# Altium PCB XiaoZhi.pcbdoc (part 1 of 3)
Units mm, origin at the board's own origin, x right, y up, seen from the top; angles counter-clockwise.
Board outline 82.34 x 112.32 mm, 2 copper layers (Top Layer, Bottom Layer); 165 components, 129 nets, 592 pads, 327 vias.
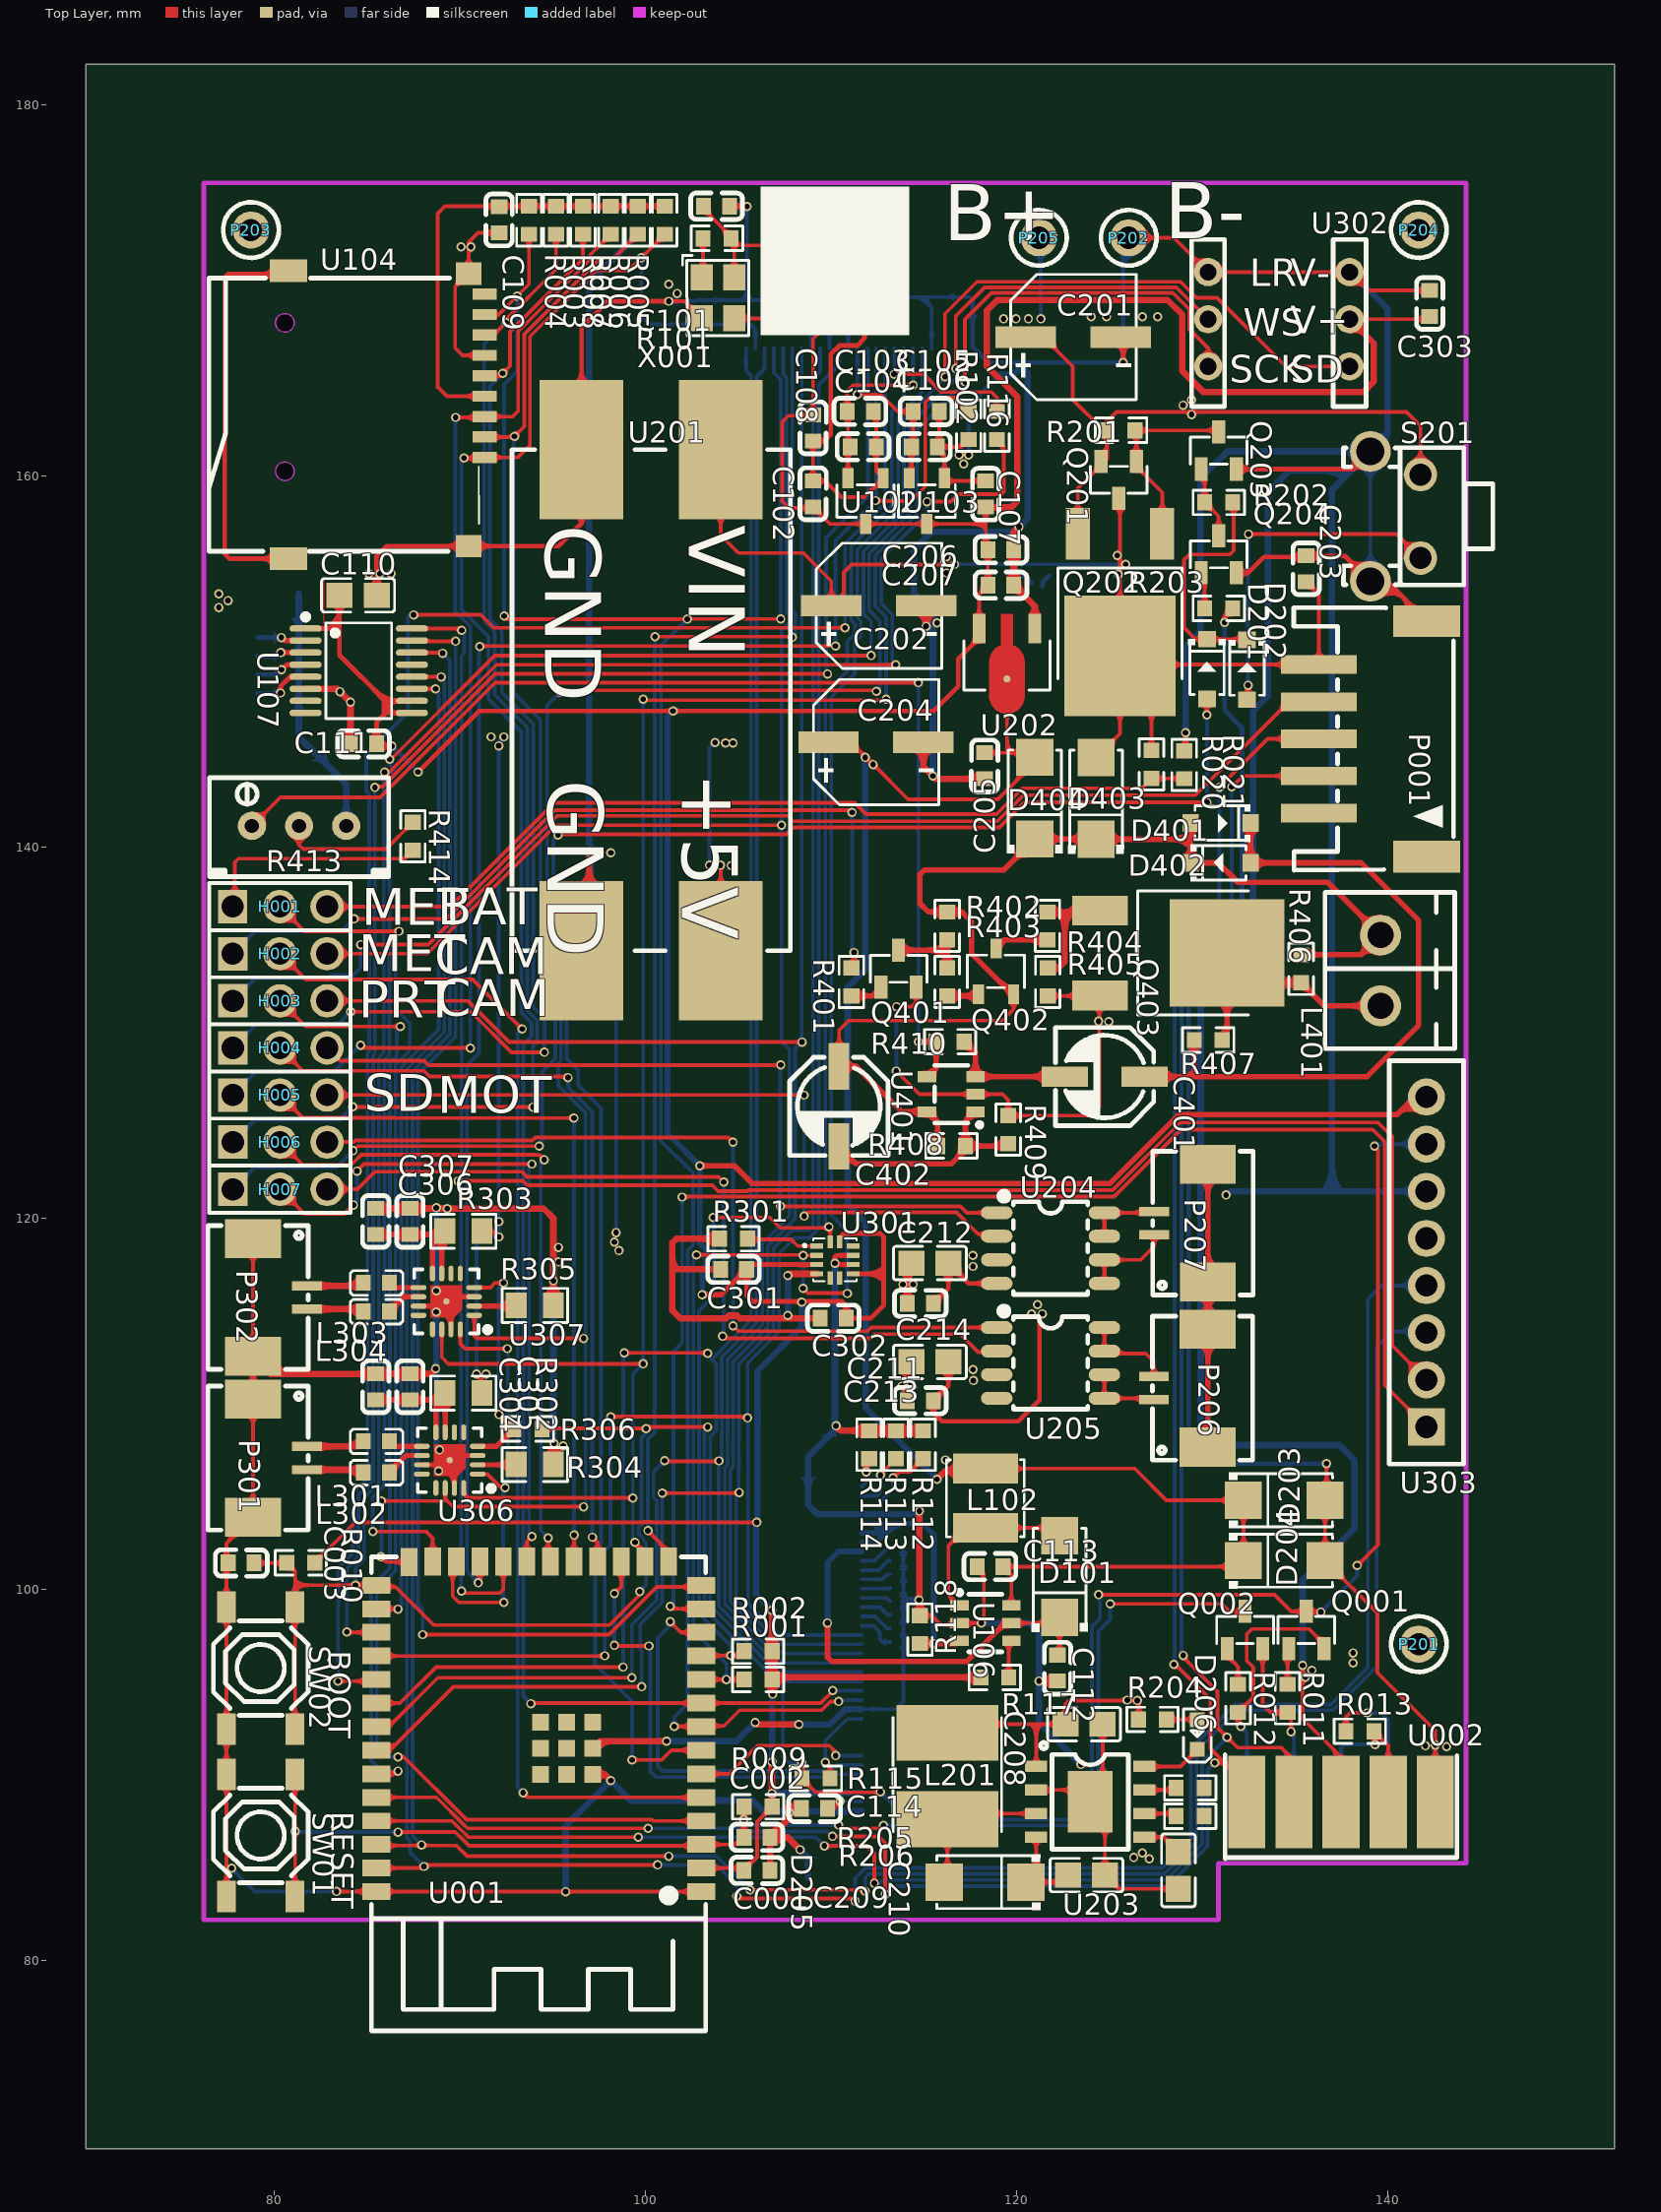
[diagram p0: Top Layer view]
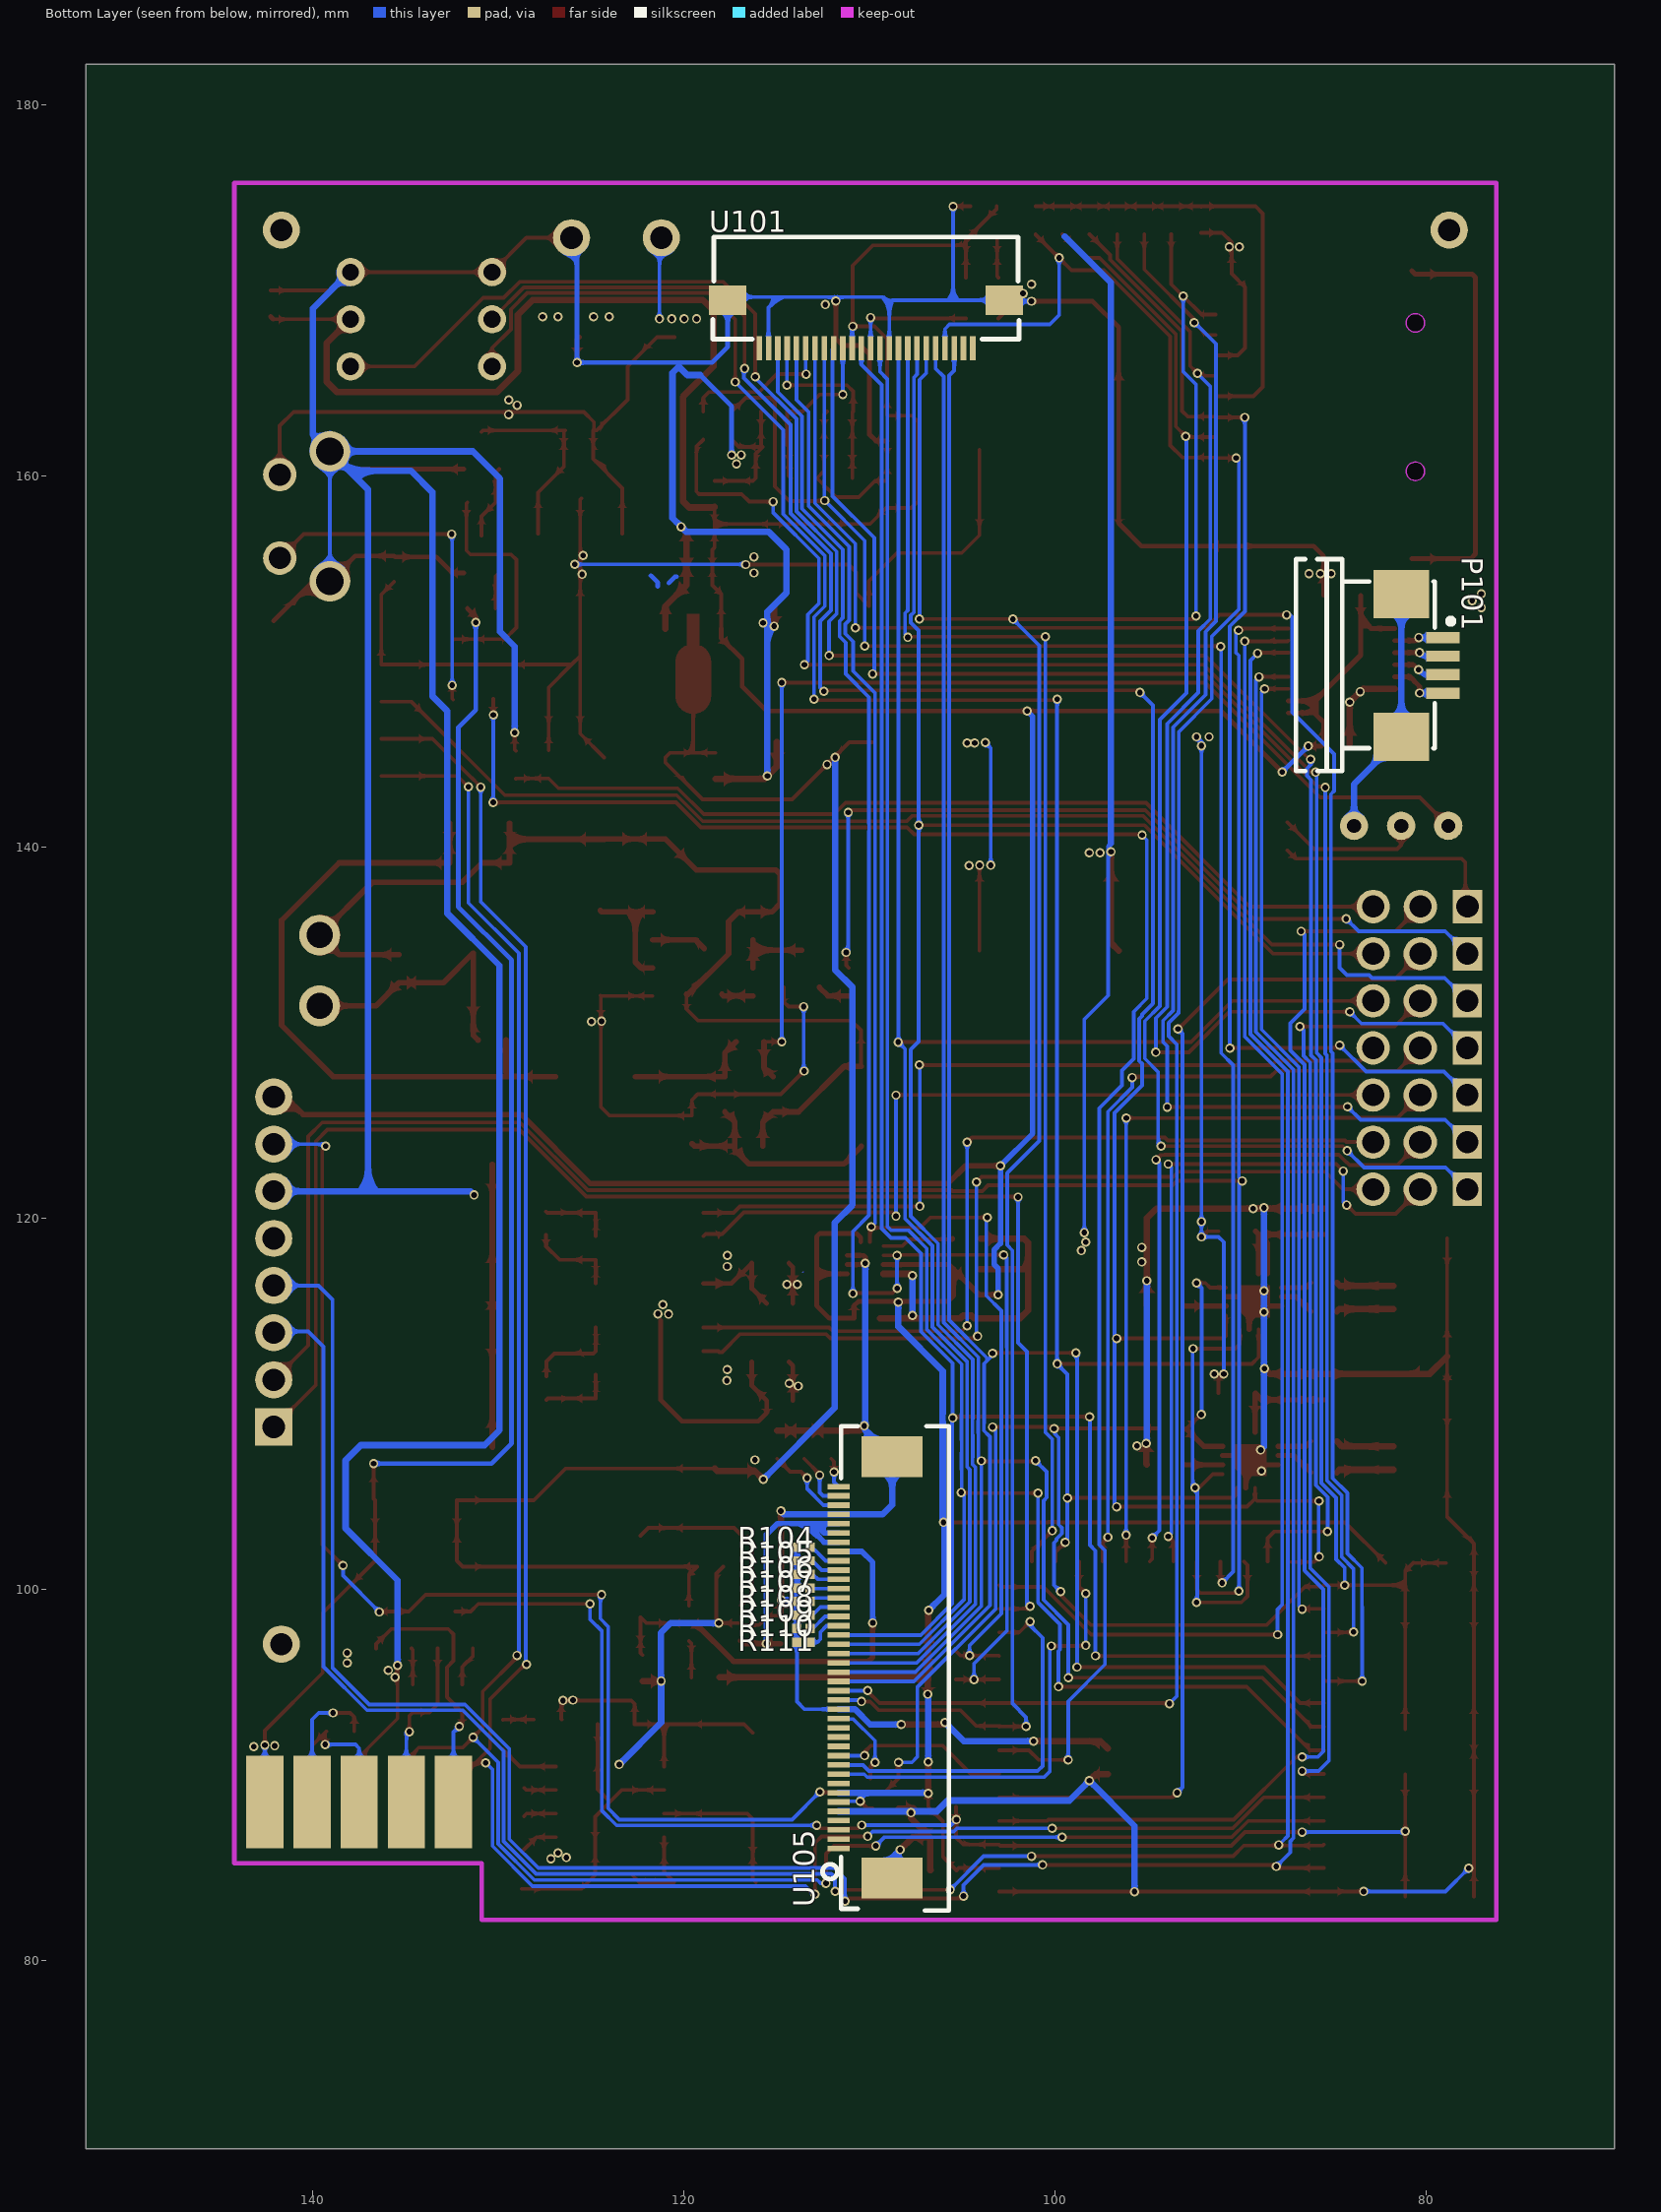
[diagram p1: Bottom Layer view, seen from below]

## Layer stack, top to bottom
Top Layer: signal copper (thickness not stored)
Dielectric: dielectric 0.32, FR-4, Dk 4.8
Bottom Layer: signal copper (thickness not stored)

## Board outline
152.188,69.85 69.85,69.85 69.85,182.168 152.188,182.168

## Design rules (kind name [scope] priority, off if disabled: settings)
BoardOutlineClearance copperThickness1oz [All] p0: genericclearance=0.254 ignorepadtopadclearanceinfootprint=FALSE except(0: Arc-SplitContinuation Track-SplitContinuation SMDPad-SplitContinuation THPad-SplitContinuation Via-SplitContinuation Fill-SplitContinuation Poly-SplitContinuation Region-SplitContinuation Text-SplitContinuation; 0.152: Track-CutoutEdge SMDPad-CutoutEdge THPad-CutoutEdge Via-CutoutEdge Region-CutoutEdge; 0.3: Track-OutlineEdge SMDPad-OutlineEdge THPad-OutlineEdge Via-OutlineEdge Fill-OutlineEdge Region-OutlineEdge Poly-OutlineEdge Text-OutlineEdge Fill-CutoutEdge)
BoardOutlineClearance copperThickness2oz [All] p0: genericclearance=0.254 ignorepadtopadclearanceinfootprint=FALSE except(0: Arc-SplitContinuation Track-SplitContinuation SMDPad-SplitContinuation THPad-SplitContinuation Via-SplitContinuation Fill-SplitContinuation Poly-SplitContinuation Region-SplitContinuation Text-SplitContinuation; 0.152: Track-CutoutEdge SMDPad-CutoutEdge THPad-CutoutEdge Via-CutoutEdge Region-CutoutEdge; 0.3: Track-OutlineEdge SMDPad-OutlineEdge THPad-OutlineEdge Via-OutlineEdge Fill-OutlineEdge Region-OutlineEdge Poly-OutlineEdge Text-OutlineEdge Fill-CutoutEdge)
Clearance copperThickness1oz [(InNet('GND') OR InNet('CAM_RESET') OR InNet('CAM_PWDN') OR InNet('CAM_2V8') OR InNet('CAM_1V2') OR InNet('CAM_VSYNC') OR InNet('CAM_HREF') OR InNet('CAM_D7') OR InNet('CAM_XCLK') OR InNet('CAM_D6') OR InNet('CAM_D5') OR InNet('CAM_PCLK') OR InNet('CAM_D4') OR InNet('CAM_D0') OR InNet('CAM_D3') OR InNet('CAM_D1') OR InNet('CAM_D2') OR InNet('$2N1529') OR InNet('CAM_SDA') OR InNet('CAM_SCL') OR InNet('+3V3') OR InNet('SYS_RESET') OR InNet('GPIO4') OR InNet('GPIO6') OR InNet('GPIO7') OR InNet('GPIO8') OR InNet('GPIO19') OR InNet('GPIO20') OR InNet('GPIO46') OR InNet('GPIO9') OR InNet('GPIO10') OR InNet('GPIO11') OR InNet('GPIO12') OR InNet('GPIO13') OR InNet('GPIO14') OR InNet('GPIO47') OR InNet('GPIO48') OR InNet('GPIO45') OR InNet('GPIO35') OR InNet('GPIO2') OR InNet('GPIO1') OR InNet('$2N4034') OR InNet('$2N5674') OR InNet('+5V') OR InNet('$2N9566') OR InNet('$2N4288') OR InNet('$2N4289') OR InNet('$2N4290') OR InNet('$2N4291') OR InNet('$4N1223') OR InNet('$4N1101') OR InNet('$2N3573') OR InNet('$2N3651') OR InNet('$2N3677') OR InNet('$2N3703') OR InNet('$2N3729') OR InNet('$2N3755') OR InNet('$2N3781') OR InNet('$2N3807') OR InNet('$2N3906') OR InNet('$2N3932') OR InNet('$2N3958') OR InNet('$2N4007') OR InNet('$2N9598') OR InNet('$2N5846') OR InNet('$3N786') OR InNet('ESP32_RXD') OR InNet('ESP32_TXD') OR InNet('$1N6467') OR InNet('$1N6461') OR InNet('$1N6473') OR InNet('$1N6454') OR InNet('$1N6533') OR InNet('VBIN') OR InNet('+12V') OR InNet('$4N3143') OR InNet('$4N3131') OR InNet('CH343_3V3') OR InNet('VUSB') OR InNet('$4N4759') OR InNet('$4N4778') OR InNet('$4N4910') OR InNet('$4N4869') OR InNet('$4N3126') OR InNet('$4N4944') OR InNet('$4N4990') OR InNet('GPIO5') OR InNet('$6N909') OR InNet('$6N916') OR InNet('$6N914') OR InNet('$6N910') OR InNet('METAL_ADC') OR InNet('METAL_DEC') OR InNet('$6N908') OR InNet('$6N902') OR InNet('$6N903') OR InNet('$6N904') OR InNet('$6N905') OR InNet('$6N906') OR InNet('$6N913') OR InNet('$6N919') OR InNet('GPIO42') OR InNet('PRINTER_DTR') OR InNet('$3N1786') OR InNet('$3N1782') OR InNet('$3N2345') OR InNet('$3N2408') OR InNet('$3N2349') OR InNet('$3N2410') OR InNet('$3N2354') OR InNet('$3N2458') OR InNet('$3N2359') OR InNet('$3N2460') OR InNet('$3N1823') OR InNet('$3N1859') OR InNet('$3N1773') OR InNet('$1N10662') OR InNet('SD_D0/MISO') OR InNet('SD_D3/CS') OR InNet('SD_CMD/MOSI') OR InNet('SD_CLK/SCK') OR InNet('MOT1_A') OR InNet('MOT1_B') OR InNet('MOT2_A') OR InNet('MOT2_B') OR InNet('$4N7783') OR InNet('$4N7788') OR InNet('$4N7774') OR InNet('$4N7778'))] p1: gap=0.178 ignorepadtopadclearanceinfootprint=FALSE except(0.102: Track-Track; 0.119: Track-Via; 0.152: Track-SMDPad SMDPad-SMDPad Track-THPad SMDPad-THPad THPad-THPad SMDPad-Via THPad-Via Via-Via SMDPad-Fill THPad-Fill Via-Fill Fill-Fill Track-Region SMDPad-Region THPad-Region Via-Region Region-Region Track-Poly SMDPad-Poly THPad-Poly Via-Poly Fill-Poly Region-Poly Poly-Poly Track-Text SMDPad-Text THPad-Text Via-Text Fill-Text Region-Text Poly-Text Text-Text; 0.175: Track-Hole SMDPad-Hole THPad-Hole Via-Hole Fill-Hole Region-Hole Poly-Hole Text-Hole Sheet-Hole; 0.3: Track-Fill Fill-Region Track-Sheet SMDPad-Sheet THPad-Sheet Via-Sheet Fill-Sheet Region-Sheet Poly-Sheet Text-Sheet)
Clearance copperThickness2oz [All] p1: gap=0.178 ignorepadtopadclearanceinfootprint=FALSE except(0.152: Track-SMDPad SMDPad-SMDPad Track-THPad SMDPad-THPad THPad-THPad Track-Via SMDPad-Via THPad-Via Via-Via SMDPad-Fill THPad-Fill Via-Fill Fill-Fill Track-Region SMDPad-Region THPad-Region Via-Region Region-Region Track-Poly SMDPad-Poly THPad-Poly Via-Poly Fill-Poly Region-Poly Poly-Poly Track-Text SMDPad-Text THPad-Text Via-Text Fill-Text Region-Text Poly-Text Text-Text; 0.175: Track-Hole SMDPad-Hole THPad-Hole Via-Hole Fill-Hole Region-Hole Poly-Hole Text-Hole Sheet-Hole; 0.203: Track-Track; 0.3: Track-Fill Fill-Region Track-Sheet SMDPad-Sheet THPad-Sheet Via-Sheet Fill-Sheet Region-Sheet Poly-Sheet Text-Sheet)
DiffPairsRouting differentialPair [All] p1: maxuncoupledlength=10 minlimit=6 maxlimit=6 mostfreqgap=6 toplayer_minwidth=5 toplayer_prefwidth=10 toplayer_maxwidth=100 bottomlayer_minwidth=5 bottomlayer_prefwidth=10 bottomlayer_maxwidth=100
PasteMaskExpansion pasteMaskExpansion [All] p1: expansion=0
PlaneConnect innerPlane [All] p1: planeconnectstyle=Relief reliefexpansion=0.508 reliefentries=4 reliefconductorwidth=0.254 reliefairgap=0.254
PolygonConnect copperRegion [All] p1: connectstyle=Direct reliefentries=4 reliefconductorwidth=10 polygonreliefangle="90 Angle" airgapwidth=10
RoutingVias viaSize [All] p1: viastyle="Through Hole" holewidth=11.811 minholewidth=11.811 maxholewidth=248.0314 width=19.685 minwidth=19.685 maxwidth=393.7008
SolderMaskExpansion solderMaskExpansion [All] p1: useseparateexpansions=TRUE expansion=2 expansionbottom=2
Width copperThickness1oz [All] p1: maxlimit=100 minlimit=5 preferedwidth=10
Width copperThickness2oz [All] p1: maxlimit=100 minlimit=8 preferedwidth=10

## Components (designator, comment, footprint, x,y, rotation, side; value= is the part's Value field where it differs from the comment)
C001 "CAP_0603" C0603 105.99,84.848 r180 top
C002 "CAP_0603" C0603 106.005,86.626 r0 top
C003 "CAP_0603" C0603 78.21,101.41 r180 top
C101 "CAP_0603" C0603 103.83,174.52 r0 top
C102 "CAP_0603" C0603 109.021,159.016 r270 top
C103 "CAP_0603" C0603 111.561,163.461 r0 top
C104 "CAP_0603" C0603 111.724,161.556 r0 top
C105 "CAP_0603" C0603 115.117,163.461 r0 top
C106 "CAP_0603" C0603 115.026,161.556 r0 top
C107 "100nF" C0603 118.328,159.016 r90 top
C108 "0.1UF" C0603 109.021,162.572 r270 top
C109 "CAP_0603" C0603 92.11,173.789 r90 top
C110 "CGA0805X5R106K250MT" C0805 84.51,153.555 r0 top
C111 "CGA0603X7R104K500JT" C0603 84.8,145.554 r0 top
C112 "1uF" C0603 122.2,95.75 r90 top
C113 "1uF" C0603 118.561,101.216 r0 top
C114 "CAP_0603" C0603 109.105,88.182 r180 top
C201 "VEJ101M1CTR-0605" CAP-SMD_BD6.3-L6.6-W6.6-LS7.2-R-RD 123.04,167.47 r180 top
C202 "VEJ101M1CTR-0605" CAP-SMD_BD6.3-L6.6-W6.6-LS7.2-R-RD 112.56,152.99 r180 top
C203 "CAP_0603" C0603 135.59,154.98 r270 top
C204 "VEJ101M1CTR-0605" CAP-SMD_BD6.3-L6.6-W6.6-LS7.2-R-RD 112.41,145.64 r180 top
C205 "CAP_0603" C0603 118.27,144.37 r90 top
C206 "CAP_0603" C0603 119.14,156.009 r180 top
C207 "CAP_0603" C0603 119.14,154.104 r180 top
C208 "CAP_0603" C0805 123.626,92.722 r0 top
C209 "CAP_0603" C0805 123.753,84.594 r0 top
C210 "CAP_0603" C0805 128.706,84.848 r270 top
C211 "CAP_0603" C0805 115.317,112.247 r180 top
C212 "CAP_0603" C0805 115.317,117.567 r180 top
C213 "CAP_0603" C0603 114.81,110.16 r0 top
C214 "CAP_0603" C0603 114.81,115.394 r0 top
C301 "CGA0603X7R104K500JT" C0603 104.739,117.233 r180 top
C302 "CGA0603X7R104K500JT" C0603 110.11,114.6 r0 top
C303 "CGA0603X7R104K500JT" C0603 142.25,169.28 r270 top
C304 "22uF" C0603 85.46,110.9 r270 top
C305 "100nF" C0603 87.3,110.9 r270 top
C306 "22uF" C0603 87.3,119.81 r270 top
C307 "100nF" C0603 85.46,119.81 r270 top
C401 "1uF/50V" CAP-SMD_BD5.0-L5.3-W5.3-RD 124.73,127.62 r0 top
C402 "100uF/50V" CAP-SMD_BD5.0-L5.3-W5.3-RD 110.41,126.02 r90 top
D101 "SS14_C84343" SMA_L4.3-W2.6-LS5.2-RD 122.31,100.68 r90 top
D201 "1N4148W-E3-18" SOD-123_L2.7-W1.6-LS3.7-FD 132.403,149.544 r90 top
D202 "1N4148W-E3-18" SOD-123_L2.7-W1.6-LS3.7-FD 130.244,149.58 r90 top
D203 "SS34A_C211775" SMA_L4.3-W2.6-LS5.2-RD 134.41,104.792 r0 top
D204 "SS34A_C211775" SMA_L4.3-W2.6-LS5.2-RD 134.41,101.536 r0 top
D205 "SS34A_C211775" SMA_L4.3-W2.6-LS5.2-RD 118.292,84.213 r180 top
D206 "LED_0603-R" LED_0603 129.722,92.214 r90 top
D401 "1N4148W-E3-18" SOD-123_L2.7-W1.6-LS3.7-FD 130.98,141.28 r0 top
D402 "1N4148W-E3-18" SOD-123_L2.7-W1.6-LS3.7-FD 130.98,139.14 r180 top
D403 "SS34A_C211775" SMA_L4.3-W2.6-LS5.2-RD 124.27,142.61 r90 top
D404 "SS34A_C211775" SMA_L4.3-W2.6-LS5.2-RD 120.97,142.62 r90 top
H001 "2.54-1*3P针" HDR-TH_3P-P2.54-V-M-1 80.295,136.781 r0 top
H002 "2.54-1*3P针" HDR-TH_3P-P2.54-V-M-1 80.298,134.243 r0 top
H003 "2.54-1*3P针" HDR-TH_3P-P2.54-V-M-1 80.3,131.704 r0 top
H004 "2.54-1*3P针" HDR-TH_3P-P2.54-V-M-1 80.3,129.166 r0 top
H005 "2.54-1*3P针" HDR-TH_3P-P2.54-V-M-1 80.3,126.627 r0 top
H006 "2.54-1*3P针" HDR-TH_3P-P2.54-V-M-1 80.3,124.089 r0 top
H007 "2.54-1*3P针" HDR-TH_3P-P2.54-V-M-1 80.3,121.55 r0 top
L102 "YNR4030-220M" IND-SMD_L4.0-W4.0 118.307,104.899 r270 top
L201 "2.2uH" IND-SMD_L5.8-W5.2 116.26,89.928 r270 top
L301 "1uH" L0603 85.5,107.97 r180 top
L302 "1uH" L0603 85.5,106.29 r180 top
L303 "1uH" L0603 85.5,116.51 r180 top
L304 "1uH" L0603 85.5,114.964 r180 top
L401 "300~500uH" CONN-TH_2P-P3.81_KF2EDGV-3.81-2P 139.6,133.34 r90 top
P001 "HX20007-5AWB" CONN-SMD_5P-P2.00_HX20007-5AWB 139.18,145.82 r90 top
P101 "TS" FPC-SMD_4P-P1.00_AFA07-S04ECA-00 80.2,149.78 r270 bottom locked
P201 "Single_Pin" Single_Pin 141.66,97.04 r0 top locked
P202 "Single_Pin" Single_Pin 126.03,172.82 r0 top
P203 "Single_Pin" Single_Pin 78.74,173.24 r0 top locked
P204 "Single_Pin" Single_Pin 141.66,173.24 r0 top
P205 "Single_Pin" Single_Pin 121.193,172.82 r0 top
P206 "1.25-2P WT" CONN-SMD_1.25-2PWT 128.83,110.83 r270 top
P207 "1.25-2P WT" CONN-SMD_1.25-2PWT 128.85,119.72 r270 top
P301 "1.25-2P WT" CONN-SMD_1.25-2PWT 80.3,107.06 r90 top
P302 "1.25-2P WT" CONN-SMD_1.25-2PWT 80.3,115.72 r90 top
Q001 "SS8050" SOT-23-3_L2.9-W1.3-P1.90-LS2.4-BR 135.6,97.802 r270 top
Q002 "SS8050" SOT-23-3_L2.9-W1.3-P1.90-LS2.4-BR 132.298,97.802 r270 top
Q201 "AO3401_C181091" SOT-23-3_L2.9-W1.3-P1.90-LS2.4-BR 125.492,159.778 r90 top
Q202 "NCE40P40K" TO-252-2_L6.6-W6.1-P4.57-LS9.9-TL-CW 125.563,153.576 r270 top
Q203 "SS8050" SOT-23-3_L2.9-W1.3-P1.90-LS2.4-BR 130.879,161.355 r270 top
Q204 "SS8050" SOT-23-3_L2.9-W1.3-P1.90-LS2.4-BR 130.879,155.767 r270 top
Q401 "MMBT3904" SOT-23-3_L2.9-W1.3-P1.90-LS2.4-BR 113.63,133.435 r270 top
Q402 "MMBT3906-7-F" SOT-23-3_L2.9-W1.6-P1.90-LS2.8-BR 118.88,133.29 r270 top
Q403 "WSF10N40" TO-252-2_L6.6-W6.1-P4.57-LS9.9-BR-CW 127.9,134.28 r180 top
R001 "3.3K" R0603 106.061,95.135 r180 top
R002 "3.3K" R0603 106.061,96.659 r180 top
R003 "3.3K" R0603 95.172,173.764 r270 top
R004 "3.3K" R0603 93.716,173.764 r270 top
R005 "3.3K" R0603 101.034,173.764 r270 top
R006 "3.3K" R0603 99.579,173.764 r270 top
R007 "3.3K" R0603 98.123,173.764 r270 top
R008 "3.3K" R0603 96.627,173.764 r270 top
R009 "10K" R0603 106.061,88.277 r0 top
R010 "10K" R0603 81.42,101.42 r0 top
R011 "10K" R0603 134.584,94.119 r270 top
R012 "10K" R0603 131.917,94.119 r270 top
R013 "10" R0603 138.485,92.341 r180 top
R020 "100K" R0603 127.26,144.44 r270 top
R021 "10K" R0603 129.02,144.42 r90 top
R101 "4.7K" R0603 103.85,172.79 r0 top
R102 "4.7K" R0603 117.403,162.699 r270 top
R104 "0R" short_package 113.536,102.256 r270 bottom
R105 "0R" short_package 113.536,101.526 r270 bottom
R106 "0R" short_package 113.536,100.796 r270 bottom
R107 "0R" short_package 113.536,100.066 r270 bottom
R108 "0R" short_package 113.536,99.337 r270 bottom
R109 "0R" short_package 113.536,98.607 r270 bottom
R110 "0R" short_package 113.536,97.877 r270 bottom
R111 "0R" short_package 113.536,97.147 r270 bottom
R112 "0R" R0603 114.95,107.78 r270 top
R113 "0R" R0603 113.495,107.78 r270 top
R114 "0R" R0603 112.04,107.78 r270 top
R115 "0R" R0603 109.176,89.801 r0 top
R116 "0R" R0603 118.927,162.699 r90 top
R117 "1k" R0603 118.815,95.247 r180 top
R118 "5.1R" R0603 114.78,97.82 r270 top
R201 "Res_0603" R0603 125.619,162.445 r180 top
R202 "Res_0603" R0603 130.879,158.561 r0 top
R203 "Res_0603" R0603 130.879,152.846 r0 top
R204 "Res_0603" R0603 127.309,92.976 r180 top
R205 "Res_0603" R0603 129.341,89.293 r180 top
R206 "Res_0603" R0603 129.341,87.769 r180 top
R301 "2R2" R0603 104.739,118.884 r0 top
R302 "0805W8F1002T5E_C17414" R0805 90.18,110.57 r180 top
R303 "0805W8F1002T5E_C17414" R0805 90.18,119.29 r180 top
R304 "NC" R0805 94.03,106.72 r180 top
R305 "NC" R0805 94.03,115.29 r180 top
R306 "CR0603FA10R0G" R0603 93.66,108.63 r180 top
R401 "1K" R0603 111.09,132.721 r270 top
R402 "6.8K" R0603 116.25,135.74 r90 top
R403 "1K" R0603 116.25,132.721 r270 top
R404 "100" R0603 121.65,135.74 r270 top
R405 "150" R0603 121.671,132.721 r90 top
R406 "390" R0603 135.32,133.43 r90 top
R407 "390" R0603 130.31,129.59 r0 top
R408 "47K" R0603 116.48,123.88 r0 top
R409 "62K" R0603 119.54,124.76 r90 top
R410 "2M" R0603 116.41,129.5 r0 top
R413 "3296W-1-102_C330429" RES-ADJ-TH_3296W 81.33,141.13 r90 top
R414 "10" R0603 87.46,140.57 r270 top
S201 "TC-1102N-C-A-B" SW-TH_TC-1102N-C-A-B 140.4,157.81 r90 top locked
SW01 "TS-1187A-B-A-B" SW-SMD_4P-L5.1-W5.1-P3.70-LS6.5-TL-2 79.263,86.728 r270 top
SW02 "TS-1187A-B-A-B" SW-SMD_4P-L5.1-W5.1-P3.70-LS6.5-TL-2 79.263,95.745 r270 top
U001 "ESP32-S3-WROOM-1U" ESP32-S3-WROOM-1U 94.116,92.595 r180 top
U002 "CH343_Module" CH343_Module_Mini 137.596,88.531 r180 top locked
U101 "ov2640" FPC-SMD_P0.50-24P_FGS-XJ-H2.0 110.164,168.16 r180 bottom locked
U102 "XC6206-2.8V" SOT-23-3_L2.9-W1.6-P1.90-LS2.8-BR 111.851,158.635 r90 top
U103 "XC6206-2.8V" SOT-23-3_L2.9-W1.6-P1.90-LS2.8-BR 115.153,158.635 r90 top
U104 "TF-01A_C91145" TF-SMD_TF-01A 86.041,163.287 r270 top
U105 "NV3041_480X272" FPC-SMD_AFC07-S40FCA-00 110.2,95.78 r90 bottom locked
U106 "MT9201" SOT-23-6_L2.9-W1.6-P0.95-LS2.8-BR 118.307,98.168 r180 top
U107 "TSC2046IPWR" TSSOP-16_L5.0-W4.4-P0.65-LS6.4-BL 84.546,149.491 r270 top
U201 "CX8823_5V" CX8823_MO 107.8,161.4 r270 top
U202 "ME6209A33PG" SOT-89-3_L4.5-W2.5-P1.50-LS4.2-BR 119.47,150.406 r90 top
U203 "CS5095E" ESOP-8_L4.9-W3.9-P1.27-LS6.0-BL-EP 123.954,88.541 r270 top
U204 "AM2837" sop-8_l5.0-w4.0-p1.27-ls6.2-bl 121.82,118.38 r270 top
U205 "AM2837" sop-8_l5.0-w4.0-p1.27-ls6.2-bl 121.82,112.19 r270 top
U301 "SC7A20HTR" LGA-12_L2.0-W2.0-P0.50-TL 110.2,117.741 r0 top locked
U302 "INMP441" INMP441_MODULE 137.93,165.89 r90 top locked
U303 "RFID_RC522" RFID_RC522 144.072,98.74 r90 top locked
U306 "HT517" QFN-16_L3.0-W3.0-P0.50-TL-EP1.7 89.45,106.95 r180 top
U307 "HT517" QFN-16_L3.0-W3.0-P0.50-TL-EP1.7 89.266,115.504 r180 top
U401 "LM321-TR_C97688" SOT-23-5_L3.0-W1.7-P0.95-LS2.8-BR 116.47,126.67 r0 top
X001 "Q33310F70049000" OSC-SMD_4P-L3.2-W2.5-BL 103.9,169.58 r270 top

## Footprints (in the part's own frame and the unit in brackets; to place one, negate y for a bottom-side part, rotate by r counter-clockwise, add the part's x,y. Pads: shape width x height; smd on the part's side, far side on the other; paste and mask are expansions set on the pad)
C0603 [mm]
  rect 0.8x0.9 smd: 1(-0.7,0) 2(0.7,0)
  silkscreen extent -1.41,-0.71 1.39,0.72
C0805 [mm]
  rect 1.41x1.35 smd: 1(-1,0) 2(1,0)
  silkscreen extent -1.96,-0.9 1.96,0.9
CAP-SMD_BD5.0-L5.3-W5.3-RD [mm]
  rect 2.5x1.1 smd: 1(2.15,0) 2(-2.15,0)
  silkscreen extent -2.65,-2.65 2.64,2.65
CAP-SMD_BD6.3-L6.6-W6.6-LS7.2-R-RD [mm]
  rect 3.26x1.15 smd: 1(2.555,0) 2(-2.555,0)
  silkscreen extent -3.39,-3.38 3.36,3.38
CH343_Module_Mini [mm]
  rect 2x5 smd: 1(-4.953,0) 2(-2.413,0) 3(0.127,0) 4(2.667,0) 5(5.207,0)
  rect 2x5 smd far side: 6(5.207,0) 7(2.667,0) 8(0.127,0) 9(-2.413,0) 10(-4.953,0)
  silkscreen extent -6.12,-2.54 6.38,3.05
CONN-SMD_1.25-2PWT [mil]
  rect 19.7x63 smd: 1(24.6,-57.1) 2(-24.6,-57.1)
  rect 82.7x118.1 smd: 3(125,57.1) 4(-125,57.1)
  silkscreen extent -153,-60 153,153
CONN-SMD_5P-P2.00_HX20007-5AWB [mil]
  rect 39.4x161.4 smd: 1(-157.5,114.2) 2(-78.7,114.2) 3(0,114.2) 4(78.7,114.2) 5(157.5,114.2)
  rect 66.9x141.7 smd: 6(250,-114.2) 7(-250,-114.2)
  silkscreen extent -278,-171 278,168
CONN-TH_2P-P3.81_KF2EDGV-3.81-2P [mm]
  round 2.2 hole 1.4: 1(-1.905,0) 2(1.905,0)
  silkscreen extent -4.21,-4 4.21,3
CX8823_MO [mm]
  rect 7.5x4.5 smd: 1(0,-3.75) 2(27,-3.75) 3(0,-11.25) 4(27,-11.25)
  silkscreen extent 0,-15 27,0
ESOP-8_L4.9-W3.9-P1.27-LS6.0-BL-EP [mm]
  rect 0.6x1.2 smd: 1(-1.905,-2.908) 2(-0.635,-2.908) 3(0.635,-2.908) 4(1.905,-2.908) 5(1.905,2.908) 6(0.635,2.908) 7(-0.635,2.908) 8(-1.905,2.908)
  rect 3.3x2.4 smd: 9(0,0)
  silkscreen extent -3.2,-2.67 2.55,2.05
ESP32-S3-WROOM-1U [mm]
  rect 1.5x0.9 smd: 1(-8.877,8.895) 2(-8.877,7.625) 3(-8.877,6.355) 4(-8.877,5.085) 5(-8.877,3.815) 6(-8.877,2.545) 7(-8.877,1.275) 8(-8.877,0.005) 9(-8.877,-1.265) 10(-8.877,-2.535) 11(-8.877,-3.805) 12(-8.877,-5.075) 13(-8.877,-6.345) 14(-8.877,-7.615) 27(8.623,-7.615) 28(8.623,-6.345) 29(8.623,-5.075) 30(8.623,-3.805) 31(8.623,-2.535) 32(8.623,-1.265) 33(8.623,0.005) 34(8.623,1.275) 35(8.623,2.545) 36(8.623,3.815) 37(8.623,5.085) 38(8.623,6.355) 39(8.623,7.625) 40(8.623,8.895)
  rect 0.9x1.5 smd: 15(-7.112,-8.895) 16(-5.842,-8.895) 17(-4.572,-8.895) 18(-3.302,-8.895) 19(-2.032,-8.895) 20(-0.762,-8.895) 21(0.508,-8.895) 22(1.778,-8.895) 23(3.048,-8.895) 24(4.318,-8.895) 25(5.588,-8.895) 26(6.858,-8.865)
  rect 0.9x0.9 smd: 41(-3.027,2.575) 41(-3.027,-0.225) 41(-3.027,1.175) 41(-1.627,2.575) 41(-1.627,-0.225) 41(-1.627,1.175) 41(-0.227,2.575) 41(-0.227,1.175) 41(-0.227,-0.225)
  silkscreen extent -9.13,-9.14 8.89,16.39
FPC-SMD_4P-P1.00_AFA07-S04ECA-00 [mm]
  rect 0.6x1.8 smd: 1(-1.5,1.115) 2(-0.5,1.115) 3(0.5,1.115) 4(1.5,1.115)
  rect 2.6x3 smd: 5(3.85,-1.115) 6(-3.85,-1.115)
  silkscreen extent -5.72,-6.79 5.69,1.69
FPC-SMD_AFC07-S40FCA-00 [mil]
  rect 11.8x47.2 smd: 1(-383.9,56.8) 2(-364.2,56.8) 3(-344.6,56.8) 4(-324.9,56.8) 5(-305.2,56.8) 6(-285.5,56.8) 7(-265.8,56.8) 8(-246.1,56.8) 9(-226.5,56.8) 10(-206.8,56.8) 11(-187.1,56.8) 12(-167.4,56.8) 13(-147.7,56.8) 14(-128,56.8) 15(-108.3,56.8) 16(-88.7,56.8) 17(-69,56.8) 18(-49.3,56.8) 19(-29.6,56.8) 20(-9.9,56.8) 21(9.8,56.8) 22(29.5,56.8) 23(49.1,56.8) 24(68.8,56.8) 25(88.5,56.8) 26(108.2,56.8) 27(127.9,56.8) 28(147.6,56.8) 29(167.2,56.8) 30(186.9,56.8) 31(206.6,56.8) 32(226.3,56.8) 33(246,56.8) 34(265.7,56.8) 35(285.4,56.8) 36(305,56.8) 37(324.7,56.8) 38(344.4,56.8) 39(364.1,56.8) 40(383.8,56.8)
  rect 86.6x129.9 smd: 41(-446.8,-56.8) 42(446.9,-56.8)
  silkscreen extent -516,-177 512,91
FPC-SMD_P0.50-24P_FGS-XJ-H2.0 [mm]
  rect 0.3x1.3 smd: 1(-5.748,-1.301) 2(-5.248,-1.301) 3(-4.748,-1.301) 4(-4.248,-1.301) 5(-3.748,-1.301) 6(-3.248,-1.301) 7(-2.748,-1.301) 8(-2.248,-1.301) 9(-1.748,-1.301) 10(-1.248,-1.301) 11(-0.748,-1.301) 12(-0.248,-1.301) 13(0.252,-1.301) 14(0.752,-1.301) 15(1.252,-1.301) 16(1.752,-1.301) 17(2.252,-1.301) 18(2.752,-1.301) 19(3.252,-1.301) 20(3.752,-1.301) 21(4.252,-1.301) 22(4.752,-1.301) 23(5.252,-1.301) 24(5.752,-1.301)
  rect 2x1.6 smd: 25(7.45,1.301) 26(-7.45,1.301)
  silkscreen extent -8.25,-0.8 8.25,4.7
HDR-TH_3P-P2.54-V-M-1 [mil]
  rect 62x70.9 hole 47.2: 1(-100,0)
  round 70.9 hole 47.2: 2(0,0) 3(100,0)
  silkscreen extent -150,-50 150,50
IND-SMD_L4.0-W4.0 [mil]
  rect 63x137.8 smd: 1(-63,0) 2(63,0)
  silkscreen extent -82,-83 82,83
IND-SMD_L5.8-W5.2 [mm]
  rect 3x5.5 smd: 1(2.325,0) 2(-2.325,0)
  silkscreen extent -3.15,-2.92 3,2.92
INMP441_MODULE [mil]
  round 60 hole 36: 1(0,0) 2(100,0) 3(200,0) 4(200,300) 5(100,300) 6(0,300)
  silkscreen extent -85,-35 269,335
L0603 [mm]
  rect 0.8x0.864 smd: 1(-0.7,0) 2(0.7,0)
  silkscreen extent -1.42,-0.65 1.41,0.67
LED_0603 [mil]
  rect 31.5x31.5 smd: 1(-33.5,-0.4) 2(29.5,-0.2)
  silkscreen extent -61,-30 53,30
LGA-12_L2.0-W2.0-P0.50-TL [mm]
  rect 0.7x0.28 smd: 1(-0.975,0.75) 2(-0.975,0.25) 3(-0.975,-0.25) 4(-0.975,-0.75) 7(0.975,-0.75) 8(0.975,-0.25) 9(0.975,0.25) 10(0.975,0.75)
  rect 0.28x0.7 smd: 5(-0.25,-0.975) 6(0.25,-0.975) 11(0.25,0.975) 12(-0.25,0.975)
  silkscreen extent -1.7,-1.15 1.16,1.15
OSC-SMD_4P-L3.2-W2.5-BL [mm]
  rect 1.4x1.2 smd: 1(-1.1,-0.875) 2(1.1,-0.875) 3(1.1,0.875) 4(-1.1,0.875)
  silkscreen extent -2.29,-1.9 2.03,1.65
QFN-16_L3.0-W3.0-P0.50-TL-EP1.7 [mil]
  oval 33.5x11 smd: 1(-59.1,29.5) 2(-59.1,9.8) 3(-59.1,-9.8) 4(-59.1,-29.5) 9(59.1,-29.5) 10(59.1,-9.8) 11(59.1,9.8) 12(59.1,29.5)
  oval 11x33.5 smd: 5(-29.5,-59.1) 6(-9.8,-59.1) 7(9.8,-59.1) 8(29.5,-59.1) 13(29.5,59.1) 14(9.8,59.1) 15(-9.8,59.1) 16(-29.5,59.1)
  round 13.4 smd: 17(0,0)
  Top Layer region: 33.5,33.5 33.5,-33.5 -33.5,-33.5 -33.5,16.7 -16.7,33.5
  silkscreen extent -94,-68 68,68
R0603 [mm]
  rect 0.806x0.864 smd: 1(-0.753,0) 2(0.753,0)
  silkscreen extent -1.39,-0.66 1.39,0.66
R0805 [mm]
  rect 1.133x1.377 smd: 1(-1,0) 2(1,0)
  silkscreen extent -1.76,-0.92 1.76,0.92
RES-ADJ-TH_3296W [mil]
  round 60 hole 30: 1(0.01,100) 2(0.01,0) 3(0.01,-100)
  silkscreen extent -108,-190 102,190
RFID_RC522 [mm]
  rect 2x2 hole 1.2: 1(10,2)
  round 2 hole 1.2: 2(12.54,2) 3(15.08,2) 4(17.62,2) 5(20.16,2) 6(22.7,2) 7(25.24,2) 8(27.78,2)
  silkscreen extent 8,0 29.73,4
short_package [mm]
  rect 0.5x0.5 smd: 1(0,0.35) 2(0,-0.35)
Single_Pin [mm]
  round 2 hole 1.2: 1(0,0)
  silkscreen extent -1.5,-1.5 1.5,1.5
SMA_L4.3-W2.6-LS5.2-RD [mm]
  rect 2x2 smd: 1(-2.2,0) 2(2.2,0)
  silkscreen extent -2.98,-1.5 2.6,1.5
SOD-123_L2.7-W1.6-LS3.7-FD [mm]
  rect 0.879x0.96 smd: 1(-1.61,0) 2(1.61,0)
  silkscreen extent -1.38,-1 1.61,1
sop-8_l5.0-w4.0-p1.27-ls6.2-bl [mm]
  oval 0.701x1.699 smd: 1(-1.905,-2.901) 2(-0.635,-2.901) 3(0.635,-2.901) 4(1.905,-2.901) 5(1.905,2.901) 6(0.635,2.901) 7(-0.635,2.901) 8(-1.905,2.901)
  silkscreen extent -2.99,-2.71 2.5,2
SOT-23-3_L2.9-W1.3-P1.90-LS2.4-BR [mm]
  rect 1.25x0.7 smd: 1(1,-0.95) 2(1,0.95) 3(-1,0)
  silkscreen extent -0.73,-1.53 0.73,1.53
SOT-23-3_L2.9-W1.6-P1.90-LS2.8-BR [mm]
  rect 1.07x0.6 smd: 1(1.235,-0.95) 2(1.235,0.95) 3(-1.235,0)
  silkscreen extent -0.88,-1.54 0.88,1.54
SOT-23-5_L3.0-W1.7-P0.95-LS2.8-BR [mm]
  rect 1x0.6 smd: 1(1.3,-0.95) 2(1.3,0) 3(1.3,0.95) 4(-1.3,0.95) 5(-1.3,-0.95)
  silkscreen extent -0.9,-1.78 1.65,1.55
SOT-23-6_L2.9-W1.6-P0.95-LS2.8-BR [mm]
  rect 1x0.55 smd: 1(1.4,-0.95) 2(1.4,0) 3(1.4,0.95) 4(-1.4,0.95) 5(-1.4,0) 6(-1.4,-0.95)
  silkscreen extent -0.9,-1.78 1.52,1.55
SOT-89-3_L4.5-W2.5-P1.50-LS4.2-BR [mm]
  rect 1.575x0.672 smd: 1(1.356,-1.5) 3(1.356,1.5)
  round 0.38 smd: 2(-1.356,0)
  Top Layer region: -2.283,0.95 -0.429,0.95 -0.384,0.949 -0.34,0.946 -0.296,0.94 -0.252,0.933 -0.208,0.924 -0.165,0.912 -0.123,0.899 -0.081,0.884 -0.04,0.866 0,0.847 0.04,0.826 0.078,0.803 0.115,0.779 0.151,0.752 0.185,0.724 0.219,0.695 0.251,0.664 0.281,0.631 0.31,0.597 0.337,0.562 0.362,0.525 0.386,0.488 0.408,0.449 0.428,0.409 0.447,0.33 2.144,0.33 2.144,-0.33 0.447,-0.33 0.428,-0.409 0.408,-0.449 0.386,-0.488 0.362,-0.526 0.337,-0.562 0.31,-0.597 0.281,-0.631 0.251,-0.664 0.219,-0.695 0.185,-0.725 0.151,-0.753 0.115,-0.779 0.078,-0.804 0.04,-0.827 0,-0.848 -0.04,-0.867 -0.081,-0.884 -0.123,-0.899 -0.165,-0.913 -0.208,-0.924 -0.252,-0.934 -0.296,-0.941 -0.34,-0.946 -0.384,-0.949 -0.429,-0.95 -2.283,-0.95 -2.328,-0.949 -2.372,-0.946 -2.416,-0.941 -2.46,-0.934 -2.504,-0.924 -2.547,-0.913 -2.589,-0.899 -2.631,-0.884 -2.672,-0.867 -2.713,-0.848 -2.752,-0.827 -2.79,-0.804 -2.827,-0.779 -2.863,-0.753 -2.898,-0.725 -2.931,-0.695 -2.963,-0.664 -2.993,-0.631 -3.022,-0.597 -3.049,-0.562 -3.075,-0.526 -3.098,-0.488 -3.12,-0.449 -3.141,-0.409 -3.159,-0.369 -3.175,-0.327 -3.189,-0.285 -3.202,-0.242 -3.212,-0.199 -3.22,-0.155 -3.227,-0.111 -3.231,-0.067 -3.233,-0.022 -3.233,0.022 -3.231,0.067 -3.227,0.111 -3.22,0.155 -3.212,0.199 -3.202,0.242 -3.189,0.285 -3.175,0.327 -3.159,0.369 -3.141,0.409 -3.12,0.449 -3.098,0.488 -3.075,0.525 -3.049,0.562 -3.022,0.597 -2.993,0.631 -2.963,0.664 -2.931,0.695 -2.898,0.724 -2.863,0.752 -2.827,0.779 -2.79,0.803 -2.752,0.826 -2.713,0.847 -2.672,0.866 -2.631,0.884 -2.589,0.899 -2.547,0.912 -2.504,0.924 -2.46,0.933 -2.416,0.94 -2.372,0.946 -2.328,0.949
  silkscreen extent -1.95,-2.33 0.7,2.33
SW-SMD_4P-L5.1-W5.1-P3.70-LS6.5-TL-2 [mm]
  rect 1.7x1 smd: 1(-3.3,1.85) 2(3.3,1.85) 3(-3.3,-1.85) 4(3.3,-1.85)
  silkscreen extent -2.55,-2.55 2.55,2.55
SW-TH_TC-1102N-C-A-B [mm]
  round 1.801 hole 1.199: 1(-2.25,-1.349) 2(2.25,-1.349)
  round 2.2 hole 1.501: 3(-3.5,1.351) 4(3.5,1.351)
  silkscreen extent -3.7,-5.25 3.7,2.79
TF-SMD_TF-01A [mm]
  rect 0.6x1.3 smd: 1(2.301,5.276) 2(1.201,5.276) 3(0.101,5.276) 4(-0.999,5.276) 5(-2.099,5.276) 6(-3.199,5.276) 7(-4.299,5.276) 8(-5.399,5.276) 9(-6.499,5.276)
  rect 1.2x1.4 smd: 10(-7.599,4.426) 13(7.081,4.426)
  rect 1.2x2 smd: 11(-7.76,-5.276) 12(7.76,-5.276)
  Board Outline Layer circle w0.003: c-4.95,-5.478 r0.5
  Board Outline Layer circle w0.003: c3.05,-5.475 r0.5
  Board Outline Layer region: -4.95,-4.978 -4.733,-5.027 -4.559,-5.166 -4.463,-5.367 -4.463,-5.589 -4.559,-5.79 -4.733,-5.928 -4.95,-5.978 -4.95,-5.978 -5.167,-5.928 -5.341,-5.79 -5.437,-5.589 -5.437,-5.367 -5.341,-5.166 -5.167,-5.027 -4.95,-4.978
  Board Outline Layer region: 3.05,-4.975 3.267,-5.025 3.441,-5.164 3.537,-5.364 3.537,-5.587 3.441,-5.787 3.267,-5.926 3.05,-5.975 3.05,-5.975 2.833,-5.926 2.659,-5.787 2.563,-5.587 2.563,-5.364 2.659,-5.164 2.833,-5.025 3.05,-4.975
  Multi-Layer board cut-out: -4.95,-4.978 -4.733,-5.027 -4.559,-5.166 -4.463,-5.367 -4.463,-5.589 -4.559,-5.79 -4.733,-5.928 -4.95,-5.978 -4.95,-5.978 -5.167,-5.928 -5.341,-5.79 -5.437,-5.589 -5.437,-5.367 -5.341,-5.166 -5.167,-5.027 -4.95,-4.978
  Multi-Layer board cut-out: 3.05,-4.975 3.267,-5.025 3.441,-5.164 3.537,-5.364 3.537,-5.587 3.441,-5.787 3.267,-5.926 3.05,-5.975 3.05,-5.975 2.833,-5.926 2.659,-5.787 2.563,-5.587 2.563,-5.364 2.659,-5.164 2.833,-5.025 3.05,-4.975
  silkscreen extent -7.37,-9.56 7.37,4.97
TO-252-2_L6.6-W6.1-P4.57-LS9.9-BR-CW [mm]
  rect 3x1.6 smd: 1(3.424,-2.29) 3(3.424,2.29)
  rect 6.2x5.8 smd: 2(-3.424,0)
  silkscreen extent -4.58,-3.35 1.38,3.35
TO-252-2_L6.6-W6.1-P4.57-LS9.9-TL-CW [mm]
  rect 2.8x1.3 smd: 1(-3.292,2.273) 3(-3.292,-2.273)
  rect 6.5x6 smd: 2(3.292,0)
  silkscreen extent -1.46,-3.35 4.51,3.34
TSSOP-16_L5.0-W4.4-P0.65-LS6.4-BL [mm]
  oval 0.343x1.731 smd: 1(-2.275,-2.866) 2(-1.625,-2.866) 3(-0.975,-2.866) 4(-0.325,-2.866) 5(0.325,-2.866) 6(0.975,-2.866) 7(1.625,-2.866) 8(2.275,-2.866) 9(2.275,2.866) 10(1.625,2.866) 11(0.975,2.866) 12(0.325,2.866) 13(-0.325,2.866) 14(-0.975,2.866) 15(-1.625,2.866) 16(-2.275,2.866)
  silkscreen extent -3.05,-3.02 2.58,1.77

## Via types
v1: diameter 0.5, hole 0.305, Top Layer to Bottom Layer, 327 vias

## Nets (pads, with @x,y where several pads share a name; then routed paths per layer and width w, separated by ;. In a path a pad name is that pad's centre, name@x,y a point inside that pad or via, vN(x,y) a via of type N, cw(c..) or ccw(c..) an arc to the next point about the centre after c; other vN are vias at no path point)
$1N6454: Q002.2 R011.2 U002.7 | length 9.5
  Top Layer w0.2: Q002.2@133.248,96.802 133.248,93.792 133.675,93.366 R011.2@134.584,93.366 134.77,93.18 v1(134.77,92.32)
  Bottom Layer w0.2: v1(134.77,92.32) 134.929,92.161 U002.7@134.929,88.531
$1N6461: Q001.2 R012.2 U002.6 | length 14.6
  Top Layer w0.2: v1(132.075,92.605) 131.917,92.763 R012.2@131.917,93.366 132.74,94.189 132.74,95.79 132.39,96.14 132.39,97.57 132.67,97.85 135.74,97.85 136.55,97.04 Q001.2@136.55,96.802
  Bottom Layer w0.2: v1(132.075,92.605) 132.389,92.291 U002.6@132.389,88.531
$1N6467: Q001.1 R011.1 | length 2
  Top Layer w0.2: R011.1@134.584,94.872 134.584,96.736 Q001.1@134.65,96.802
$1N6473: Q002.1 R012.1 | length 2.2
  Top Layer w0.2: Q002.1@131.348,96.802 131.348,96.382 131.917,95.813 R012.1@131.917,94.872
$1N6533: R013.2 U002.9 | length 7.7
  Top Layer w0.2: R013.2@137.732,92.341 137.732,93.102 137.96,93.33 v1(138.88,93.33)
  Bottom Layer w0.2: v1(138.88,93.33) 139.65,93.33 140.009,92.971 U002.9@140.009,88.531
$1N10662: H001.3 R020.2 R021.1 | length 49.6
  Top Layer w0.2: H001.3@82.835,136.781 89.491,136.781 95.08,142.37 111.27,142.37 111.88,141.76 118.91,141.76 120.31,143.16 126.733,143.16 R020.2@127.26,143.687 129,143.687 R021.1@129.02,143.667
$2N1529: R101.1 X001.1 | length 2.1
  Top Layer w0.2: X001.1@103.025,170.68 103.097,170.752 R101.1@103.097,172.79
$2N3573: R104.1 U105.32 | length 1.8
  Bottom Layer w0.2: U105.32@111.643,101.528 112.338,101.528 112.684,101.874 112.684,101.881 112.832,102.028 112.838,102.028 113.066,102.256 R104.1@113.186,102.256
$2N3651: R105.1 U105.31 | length 1.7
  Bottom Layer w0.2: U105.31@111.643,101.028 112.558,101.028 113.056,101.526 R105.1@113.186,101.526
$2N3677: R106.1 U105.30 | length 1.7
  Bottom Layer w0.2: U105.30@111.643,100.527 112.747,100.527 113.016,100.796 R106.1@113.186,100.796
$2N3703: R107.1 U105.29 | length 1.6
  Bottom Layer w0.2: U105.29@111.643,100.027 113.146,100.027 R107.1@113.186,100.066
$2N3729: R108.1 U105.28 | length 1.6
  Bottom Layer w0.2: U105.28@111.643,99.529 112.994,99.529 R108.1@113.186,99.337
$2N3755: R109.1 U105.27 | length 1.7
  Bottom Layer w0.2: U105.27@111.643,99.029 112.622,99.029 113.043,98.607 R109.1@113.186,98.607
$2N3781: R110.1 U105.26 | length 1.8
  Bottom Layer w0.2: U105.26@111.643,98.528 112.362,98.528 113.013,97.877 R110.1@113.186,97.877
$2N3807: R111.1 U105.25 | length 2.1
  Bottom Layer w0.2: U105.25@111.643,98.028 112.282,98.028 112.62,97.69 112.62,97.3 112.773,97.147 R111.1@113.186,97.147
$2N3906: R112.2 U105.38 | length 4.7
  Top Layer w0.2: v1(113.33,105.99) 113.67,106.33 114.254,106.33 R112.2@114.95,107.027
  Bottom Layer w0.2: U105.38@111.643,104.528 112.458,104.528 113.33,105.4 v1(113.33,105.99)
$2N3932: R113.2 U105.39 | length 3.3
  Top Layer w0.2: v1(112.658,106.141) 112.658,106.19 R113.2@113.495,107.027
  Bottom Layer w0.2: U105.39@111.643,105.028 112.478,105.028 112.658,105.208 v1(112.658,106.141)
$2N3958: R114.2 U105.40 | length 1.7
  Top Layer w0.2: v1(111.886,106.32) 111.886,106.873 R114.2@112.04,107.027
  Bottom Layer w0.2: U105.40@111.643,105.528 111.886,105.772 v1(111.886,106.32)
$2N4007: R115.2 U105.15 | length 4.6
  Top Layer w0.2: v1(109.68,90.67) 109.929,90.421 R115.2@109.929,89.801
  Bottom Layer w0.2: v1(109.68,90.67) 109.68,91.83 110.851,93.001 111.615,93.001 U105.15@111.643,93.029
$2N4034: R116.2 U101.6 | length 8.2
  Top Layer w0.2: v1(113.39,165.47) 114.97,165.47 115.928,164.512 118.628,164.512 118.927,164.213 R116.2@118.927,163.452
  Bottom Layer w0.2: v1@113.412,165.47 U101.6@113.412,166.859
$2N4288: P101.1 U107.2 | length 2.7
  Top Layer w0.254: v1(80.38,151.28) 80.544,151.116 U107.2@81.68,151.116
  Bottom Layer w0.254: P101.1@79.085,151.28 v1(80.38,151.28)
$2N4289: P101.2 U107.3 | length 2.7
  Top Layer w0.254: v1(80.34,150.466) U107.3@81.68,150.466
  Bottom Layer w0.254: P101.2@79.085,150.28 80.154,150.28 v1(80.34,150.466)
$2N4290: P101.3 U107.4 | length 2.8
  Top Layer w0.254: v1(80.39,149.55) 80.656,149.816 U107.4@81.68,149.816
  Bottom Layer w0.254: P101.3@79.085,149.28 80.12,149.28 v1(80.39,149.55)
$2N4291: P101.4 U107.5 | length 3.2
  Top Layer w0.254: v1(80.33,148.29) 80.33,148.649 80.847,149.166 U107.5@81.68,149.166
  Bottom Layer w0.254: P101.4@79.085,148.28 80.32,148.28 v1(80.33,148.29)
$2N5674: C112.2 D101.1 U105.33 U106.5 | length 22.9
  Top Layer w0.2: U106.5@119.707,98.168 121.998,98.168 D101.1@122.31,98.48 122.31,96.56 C112.2@122.2,96.45
  Top Layer w0.3: v1(109.8,98.18) 109.8,96.33 110.02,96.11 117.3,96.11 119.358,98.168 U106.5@119.707,98.168
  Bottom Layer w0.3: v1(109.8,98.18) 109.8,101.44 110.388,102.028 U105.33@111.643,102.028
$2N5846: R118.2 U105.34 U105.35 U105.36 U106.3 | length 15.9
  Top Layer w0.3: R118.2@114.78,97.067 v1(115.53,97.067) 116.755,97.067 U106.3@116.906,97.218
  Bottom Layer w0.3: U105.34@111.643,102.529 112.429,102.529 113.427,103.527 ; U105.35@111.643,103.029 112.403,103.029 112.901,103.527 ; U105.36@111.643,103.527 112.901,103.527 ; v1(115.53,97.067) 115.53,102.94 114.943,103.527 113.427,103.527 ; 112.901,103.527 113.427,103.527
$2N9566: D101.2 L102.2 U106.1 | length 10
  Top Layer w0.2: U106.1@116.906,99.118 116.32,99.704 116.32,102.35 117.269,103.299 L102.2@118.307,103.299 121.891,103.299 D101.2@122.31,102.88
$2N9598: R117.1 U106.4 | length 2
  Top Layer w0.2: R117.1@119.568,95.247 119.568,97.079 U106.4@119.707,97.218
$3N786: R301.2 U301.1 | length 3.9
  Top Layer w0.2: R301.2@105.526,118.85 107.84,118.85 108.199,118.491 U301.1@109.225,118.491
  Top Layer w0.28: R301.2@105.492,118.884 R301.2@105.526,118.85
$3N1773: R306.2 U306.4 U307.4 | length 12.4
  Top Layer w0.2: U307.4@90.768,116.254 91.634,116.254 91.88,116.5 v1(92.35,116.5) ; v1(92.1,109.411) 92.126,109.411 R306.2@92.907,108.63
  Top Layer w0.28: U306.4@90.951,107.699 91.976,107.699 R306.2@92.907,108.63
  Bottom Layer w0.2: v1(92.1,109.411) 92.074,109.437 92.074,116.224 v1(92.35,116.5)
$3N1782: C306.2 C307.2 R303.2 U307.7 U307.8 | length 8.2
  Top Layer w0.28: C307.2@85.46,119.11 C306.2@87.3,119.11 R303.2@89,119.11 ; U307.8@88.517,117.006 88.517,118.627 R303.2@89,119.11 ; U307.7@89.018,117.006 89.018,119.093 R303.2@89,119.11 ; R303.2@89.18,119.29 R303.2@89,119.11
$3N1786: C304.2 C305.2 R302.2 U306.7 U306.8 | length 8.3
  Top Layer w0.28: C304.2@85.46,110.2 C305.2@87.3,110.2 88.81,110.2 R302.2@89.18,110.57 R302.2@89.201,110.549 ; U306.8@88.701,108.451 88.701,110.049 R302.2@89.201,110.549 ; U306.7@89.201,108.451 R302.2@89.201,110.549
$3N1823: R304.2 U306.2 | length 2.1
  Top Layer w0.28: U306.2@90.951,106.701 93.011,106.701 R304.2@93.03,106.72
$3N1859: R305.2 U307.2 | length 2.3
  Top Layer w0.28: U307.2@90.768,115.256 92.996,115.256 R305.2@93.03,115.29
$3N2345: L301.1 U306.9 | length 1.9
  Top Layer w0.28: L301.1@86.2,107.97 86.471,107.699 U306.9@87.949,107.699
$3N2349: L302.1 U306.10 | length 2.1
  Top Layer w0.28: L302.1@86.2,106.29 87.109,107.199 U306.10@87.949,107.199
$3N2354: L303.1 U307.9 | length 1.7
  Top Layer w0.28: L303.1@86.2,116.51 86.456,116.254 U307.9@87.765,116.254
$3N2359: L304.1 U307.10 | length 1.9
  Top Layer w0.28: L304.1@86.2,114.964 86.204,114.964 86.993,115.753 U307.10@87.765,115.753
$3N2408: L301.2 P301.1 | length 3.2
  Top Layer w0.35: P301.1@81.75,107.685 84.515,107.685 L301.2@84.8,107.97
$3N2410: L302.2 P301.2 | length 3.1
  Top Layer w0.35: P301.2@81.75,106.435 84.655,106.435 L302.2@84.8,106.29
$3N2458: L303.2 P302.1 | length 3.1
  Top Layer w0.35: P302.1@81.75,116.345 84.635,116.345 L303.2@84.8,116.51
$3N2460: L304.2 P302.2 | length 3.1
  Top Layer w0.35: P302.2@81.75,115.095 84.669,115.095 L304.2@84.8,114.964
$4N1101: Q203.1 Q204.3 R202.1 | length 4
  Top Layer w0.2: Q203.1@129.929,160.355 130.125,160.159 R202.1@130.125,158.561 130.879,157.808 Q204.3@130.879,156.767
$4N1223: Q201.1 Q202.1 Q203.3 R201.1 | length 10.7
  Top Layer w0.2: Q202.1@127.835,156.868 127.835,159.095 126.442,160.488 Q201.1@126.442,160.778 126.442,162.375 R201.1@126.372,162.445 130.789,162.445 Q203.3@130.879,162.355
$4N3126: Q204.1 R203.1 | length 2
  Top Layer w0.2: Q204.1@129.929,154.767 130.125,154.571 R203.1@130.125,152.846
$4N3131: D201.2 D202.2 R202.2 | length 12.8
  Top Layer w0.2: R202.2@131.632,158.561 131.69,158.503 131.69,155.97 131.48,155.76 129.29,155.76 129,155.47 129,151.81 129.619,151.191 D202.2@130.244,151.191 132.367,151.191 D201.2@132.403,151.155
$4N3143: D201.1 S201.1 | length 18.8
  Top Layer w0.2: D201.1@132.403,147.934 132.46,147.991 v1(132.46,148.71) ; v1(132.48,156.85) 140.458,156.85 S201.1@141.749,155.56
  Bottom Layer w0.2: v1(132.46,148.71) 132.46,156.83 v1(132.48,156.85)
$4N4759: C209.1 D205.1 U203.4 | length 5.1
  Top Layer w0.2: U203.4@121.045,86.636 121.045,84.766 D205.1@120.492,84.213 122.372,84.213 C209.1@122.753,84.594
$4N4778: D205.2 L201.1 U203.3 | length 8.4
  Top Layer w0.2: D205.2@116.092,84.213 116.26,84.381 L201.1@116.26,87.603 116.563,87.906 U203.3@121.045,87.906
$4N4869: D206.2 R204.1 | length 1.7
  Top Layer w0.2: R204.1@128.062,92.976 129.714,92.976 D206.2@129.727,92.963
$4N4910: D206.1 U203.8 | length 3.3
  Top Layer w0.2: U203.8@126.862,90.446 128.815,90.446 D206.1@129.732,91.363
$4N4944: R205.2 U203.7 | length 1.8
  Top Layer w0.2: U203.7@126.862,89.176 128.471,89.176 R205.2@128.588,89.293
$4N4990: R206.2 U203.6 | length 1.8
  Top Layer w0.2: U203.6@126.862,87.906 128.45,87.906 R206.2@128.588,87.769